# Altium PCB toasterBigBoardVERSION2_2layer.PcbDoc
Units mil, origin at the board's own origin, x right, y up, seen from the top; angles counter-clockwise.
Board outline 12550 x 9550 mil, 2 copper layers (Top Layer, Bottom Layer), stack 12.8 mil thick; 23 components, 6 nets, 49 pads, 62 vias.
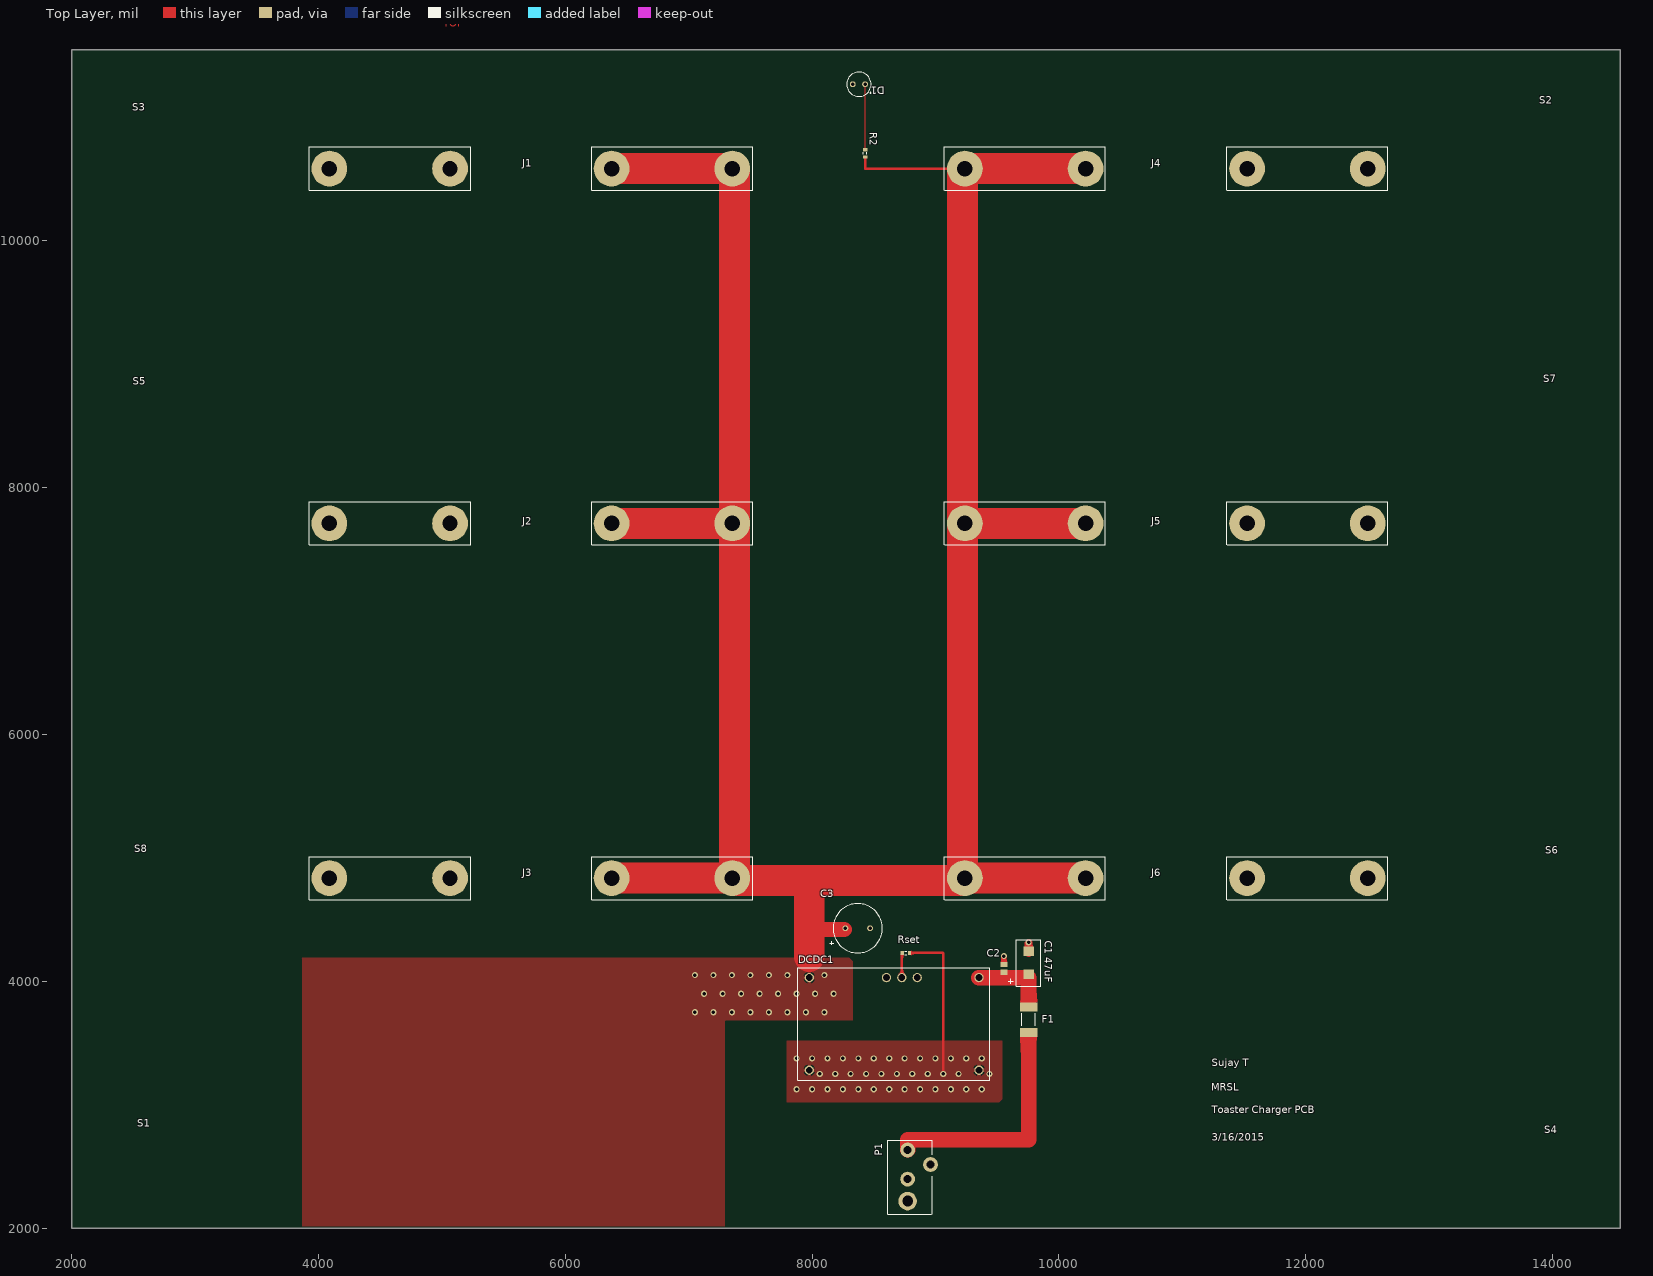
[diagram p0: Top Layer view]
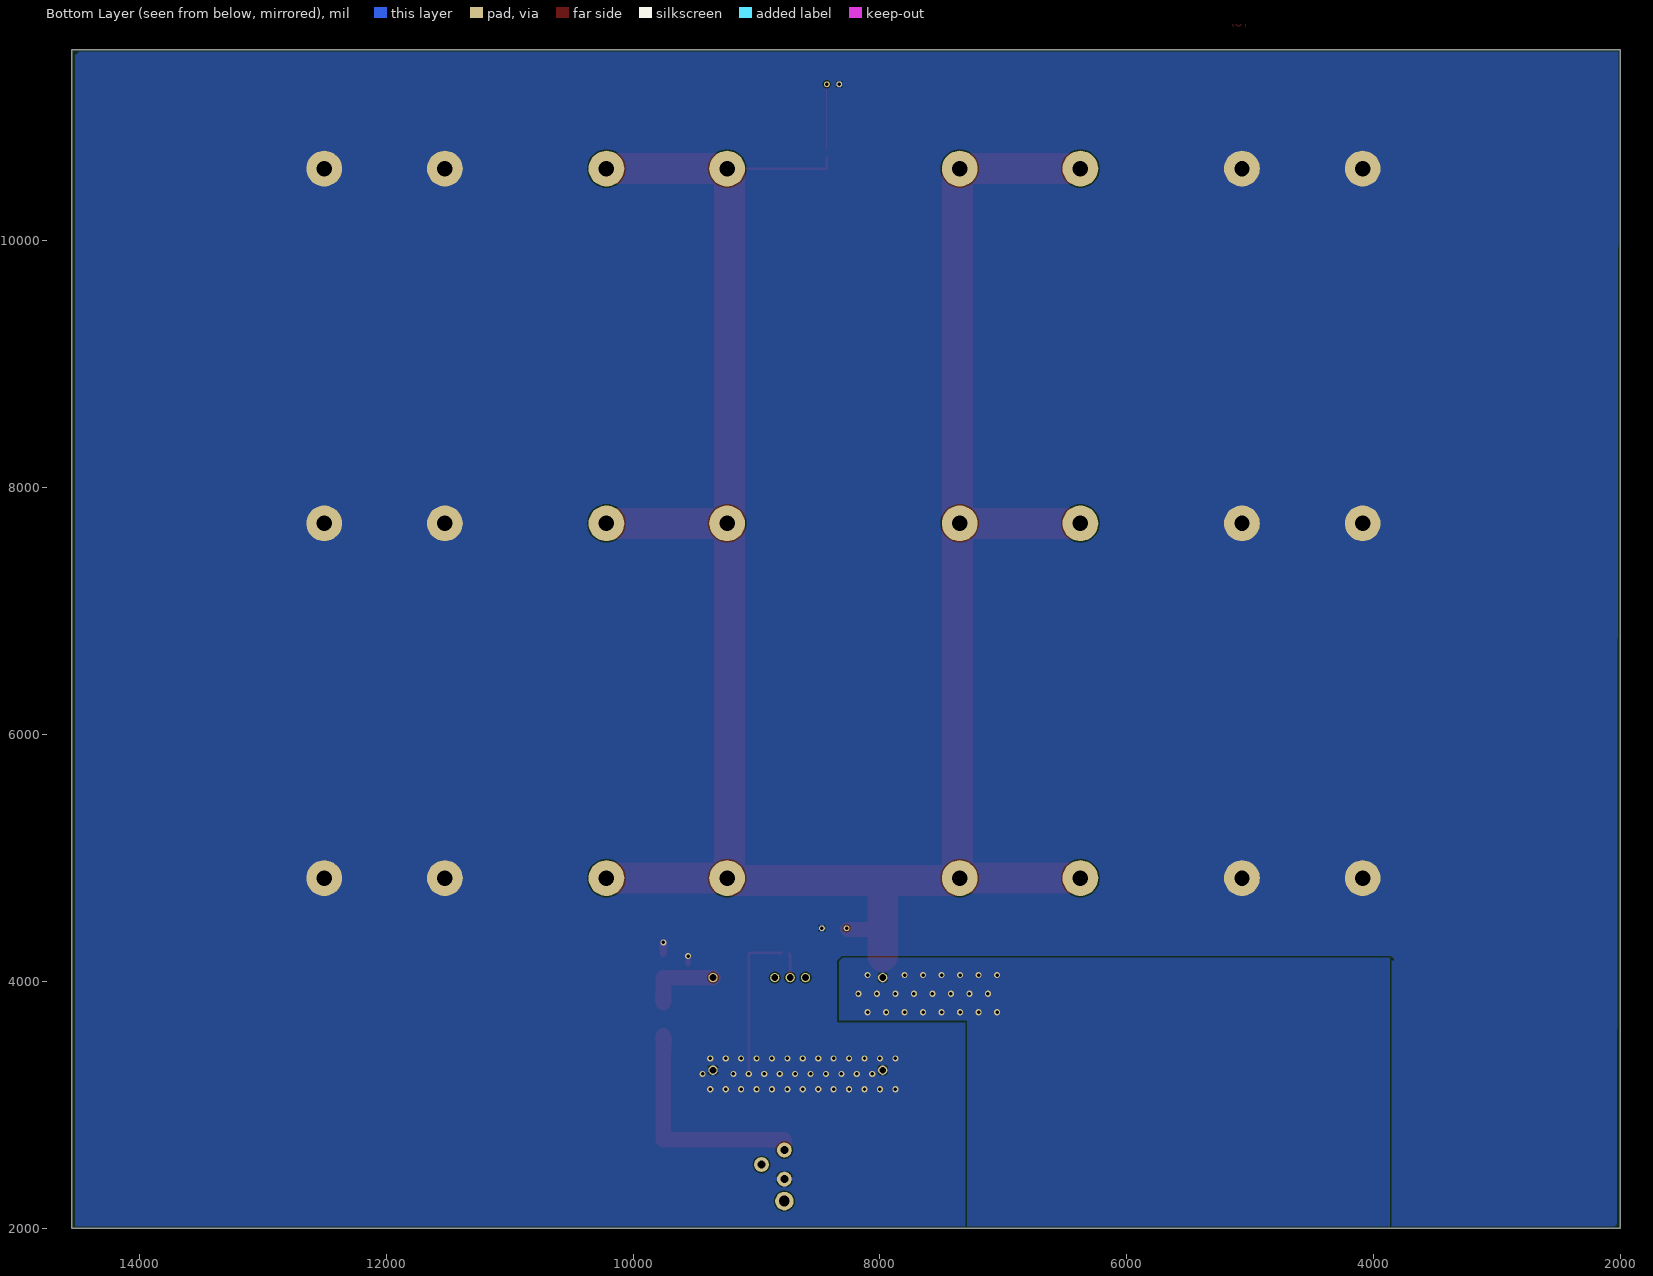
[diagram p1: Bottom Layer view, seen from below]

## Layer stack, top to bottom
Top Solder: solder mask 0.4, Solder Resist, Dk 3.5
Top Layer: signal copper 1.4
Dielectric1: core 10, FR-4, Dk 4.2
Bottom Layer: signal copper 1.4
Bottom Solder: solder mask 0.4, Solder Resist, Dk 3.5

## Board outline
2000,2000 14550,2000 14550,11550 2000,11550

## Design rules (kind name [scope] priority, off if disabled: settings)
Clearance [All] p1: gap=10
HoleSize [All] p1: absolutevalues=TRUE maxlimit=500 minlimit=1 maxpercent=80.000 minpercent=20.000
PlaneConnect [InNet('GND')] p1: planeconnectstyle=Direct reliefexpansion=20 reliefentries=4 reliefconductorwidth=10 reliefairgap=10
PolygonConnect PolygonConnect_1 [( ( InNet('GND') AND ( InComponent('P1') OR InComponent('C3') OR InComponent('DCDC1')OR InComponent('D1') ) )  OR (InNet('VOUT')AND InComponent('DCDC1')) )] p1: connectstyle=Relief reliefconductorwidth=35 reliefentries=4 polygonreliefangle="90 Angle" airgapwidth=10
PolygonConnect [All] p2: connectstyle=Direct reliefconductorwidth=10 reliefentries=4 polygonreliefangle="90 Angle" airgapwidth=10
RoutingLayers RoutingLayers_1 [All] p1: top layer_v5=TRUE bottom layer_v5=TRUE
RoutingLayers [OnLayer('GND Plane')] p2: top layer_v5=TRUE bottom layer_v5=TRUE
RoutingVias [All] p1: holewidth=28 width=50 viastyle="Through Hole" minholewidth=28 minwidth=50 maxholewidth=28 maxwidth=50
SMDNeckDown [All] p1 off: percent=50.000
SilkToSolderMaskClearance SilkscreenOverComponentPads [IsPad] p1: minsilkscreentomaskgap=3 clearancetoexposedcopper=TRUE
SolderMaskExpansion [All] p1: expansion=4
Width "Schematic Width Constraint_1" [InNet('VOUT')] p1: maxlimit=250 minlimit=20 preferedwidth=125 minimp=50.000000 maximp=50.000000 favimp=50.000000
Width "Schematic Width Constraint" [InNet('GND')] p2: maxlimit=250 minlimit=20 preferedwidth=125 minimp=50.000000 maximp=50.000000 favimp=50.000000
Width "Schematic Width Constraint_6" [InNet('12V_IN')] p3: maxlimit=250 minlimit=20 preferedwidth=125 minimp=50.000000 maximp=50.000000 favimp=50.000000
Width "Schematic Width Constraint_4" [InNet('12V_RAW')] p4: maxlimit=250 minlimit=20 preferedwidth=125 minimp=50.000000 maximp=50.000000 favimp=50.000000
Width [All] p5: maxlimit=60 minlimit=10 preferedwidth=10 minimp=50.000000 maximp=50.000000 favimp=50.000000
26 further rules are at their usual default settings.

## Components (designator, comment, footprint, x,y, rotation, side; value= is the part's Value field where it differs from the comment)
"C1 47uF" "CapTant6032-28" CAPTANT6032-28 9755,4150 r90 top
C2 "CIN" CAPC2012L 9555,4105 r270 top
C3 "COUT" "RAD-0.2 - POLARIZED" 8370,4430 r180 top
D1 "LED Power 1" DIODE-0.1 8380,11270 r180 top
DCDC1 "PTN78020WAH" PTN78020WAH 8665,3655 r180 top
F1 "PTC" J1-1812 9755,3690 r90 top
J1 "ToasterChargerProng" TOASTERCHARGERPRONG 5720.65,10586.5 r180 top
J2 "ToasterChargerProng" TOASTERCHARGERPRONG 5720.65,7711.5 r180 top
J3 "ToasterChargerProng" TOASTERCHARGERPRONG 5720.65,4836.5 r180 top
J4 "ToasterChargerProng" TOASTERCHARGERPRONG 10870.9,10586.5 r0 top
J5 "ToasterChargerProng" TOASTERCHARGERPRONG 10870.9,7711.5 r0 top
J6 "ToasterChargerProng" TOASTERCHARGERPRONG 10870.9,4836.5 r0 top
P1 "PJ-059A" PJ-059A 8782,2421 r90 top
R2 "Resistor" J1-0603 8430,10710 r90 top
Rset "Resistor" J1-0603 8760,4230 r0 top
S1 "ToasterChargerZiptie" TOASTERCHARGERZIPTIEREVISED2 2562.5,2625 r0 top
S2 "ToasterChargerZiptie" TOASTERCHARGERZIPTIEREVISED2 13987.5,10925 r0 top
S3 "ToasterChargerZiptie" TOASTERCHARGERZIPTIEREVISED2 2562.5,10925 r0 top
S4 "ToasterChargerZiptie" TOASTERCHARGERZIPTIEREVISED2 13987.5,2625 r0 top
S5 "ToasterChargerZiptie" TOASTERCHARGERZIPTIEREVISED2 2562.5,8675 r180 top
S6 "ToasterChargerZiptie" TOASTERCHARGERZIPTIEREVISED2 13987.5,4875 r180 top
S7 "ToasterChargerZiptie" TOASTERCHARGERZIPTIEREVISED2 13987.5,8675 r180 top
S8 "ToasterChargerZiptie" TOASTERCHARGERZIPTIEREVISED2 2562.5,4875 r180 top

## Footprints (in the part's own frame and the unit in brackets; to place one, negate y for a bottom-side part, rotate by r counter-clockwise, add the part's x,y. Pads: shape width x height; smd on the part's side, far side on the other; paste and mask are expansions set on the pad)
CAPC2012L [mm] "Chip Capacitor, Body 2.0x1.3mm, IPC High Density"
  rect 1.1x1.4 smd: 1(-0.8,0) 2(0.8,0)
  body extent -1.1,-0.72 1.1,0.72, height 1.4
CAPTANT6032-28 [mm] "Standard capacitor sized at a C Case (6.0 x 3.2 mm)"
  rect 1.99x2.13 smd: 1(-2.36,0) 2(2.36,0)
  silkscreen extent -4.79,-2.5 4.79,4.22, body extent -2.9,-1.55 2.9,1.5, height 2.79
DIODE-0.1 [mm] "Diode, thru-hole with leads 2.54 mm apart. For use in Toaster Charger"
  round 1.2 hole 0.7: 1(-1.27,0) 2(1.27,0)
  silkscreen extent -2.57,-2.5 2.5,2.5
J1-0603 [mm] "Chip Resistor, Body 1.6x0.8mm, IPC High Density"
  rect 0.7x0.9 smd: 1(-0.75,0) 2(0.75,0)
  silkscreen extent -0.2,-0.35 0.2,0.35, body extent -0.85,-0.48 0.85,0.48, height 0.9
J1-1812 [mm] "Standard surface mount chip - 45 x 32 mm"
  rect 1.85x3.6 smd: 1(-2.615,0) 2(2.615,0)
  silkscreen extent -1.3,-1.4 1.3,1.4
PJ-059A [mil] "DC power jack, rated at 16 V. For use in Toaster Charger."
  round 120 hole 63: 1(212,7.5) 2(-24,7.5) 3(94,-177.5)
  round 150 hole 87: 4(-202,7.5)
  silkscreen extent -310,-190 291,170, body extent -305,-185 285,165, height 433
PTN78020WAH [mil] "T.I. DC/DC Converter (PTH)"
  round 75 hole 55: 1(-687.5,375) 2(-687.5,-375) 3(-187.5,-375) 4(-62.5,-375) 5(62.5,-375) 6(687.5,-375) 7(687.5,375)
  silkscreen extent -775,-455 780,455, body extent -770,-445 775,450, height 350
"RAD-0.2 - POLARIZED" [mm] "Polarized Radial Cap, Thru-Hole; 2 Leads; 0.2 in Pin Spacing."
  round 1.2 hole 0.7: 1(-2.54,0) 2(2.54,0)
  silkscreen extent -5.08,-5.08 5.71,5.08, body extent -5.07,-5.08 5.08,5.08, height 13.46
TOASTERCHARGERPRONG [mil] "PCB footprint for toaster Charger clips"
  round 290 hole 125: 1(-1632.6,0) 2(-654.6,0) 3(654.6,0) 4(1632.6,0)
  silkscreen extent -1799,-175 1794,175
TOASTERCHARGERZIPTIEREVISED2 [mil] "2nd revision for Ziptie for Toaster charger, now a cut on the mechanical layer."

## Part data
"C1 47uF": "Polarized Tantalum Capacitor for use in Toaster Charger"
C2 C3: library part Cap, "Capacitor"
D1: library part Diode, "Default Diode"
DCDC1: "T.I. DC-DC Converter"
F1: library part PTC_FUSE, "Fuse"
J1 J2 J3 J4 J5 J6: "Charger Prong Footprint for Toaster Charger"
S1 S2 S3 S4 S5 S6 S7 S8: "Slot for Ziptie connection between PCB and Toaster Charger"

## Via types
v1: diameter 50, hole 28, Top Layer to Bottom Layer, 62 vias

## Nets (pads, with @x,y where several pads share a name; then routed paths per layer and width w, separated by ;. In a path a pad name is that pad's centre, name@x,y a point inside that pad or via, vN(x,y) a via of type N, cw(c..) or ccw(c..) an arc to the next point about the centre after c; other vN are vias at no path point)
12V_IN: "C1 47uF.1" C2.2 DCDC1.2 F1.2 | length 607.5
  Top Layer w125: DCDC1.2 9755,4030 F1.2@9755,3825
12V_RAW: F1.1 P1.1 | length 1907.5
  Top Layer w125: P1.1 8774.5,2714.5 9755,2714.5 F1.1@9755,3560
D1_IN: D1.1 R2.2 | length 530
  Top Layer w10: R2.2@8430,10740 D1.1
GND: "C1 47uF.2" C2.1 C3.1 D1.2 DCDC1.1 DCDC1.7 J1.3 J1.4 J2.3 J2.4 J3.3 J3.4 J4.3 J4.4 J5.3 J5.4 J6.3 J6.4 P1.2 Rset.2 | length 1368.1
  Top Layer w20: Rset.2@8799.53,4230 9060,4230 9065,4225 9065,3280
  Top Layer w40: C2.1 v1(9555,4205)
  Top Layer w60: 9755,4227.91 v1(9755,4315)
  other v1: 7875,3125 8000,3125 8125,3125 8250,3125 8375,3125 8500,3125 8625,3125 8750,3125 8875,3125 9000,3125 9125,3125 9250,3125 9375,3125 8062.5,3250 8187.5,3250 8312.5,3250 8437.5,3250 8562.5,3250 8687.5,3250 8812.5,3250 8937.5,3250 9062.5,3250 9187.5,3250 9437.5,3250 7875,3375 8000,3375 8125,3375 8250,3375 8375,3375 8500,3375 8625,3375 8750,3375 8875,3375 9000,3375 9125,3375 9250,3375 9375,3375
VOADJUST: DCDC1.4 Rset.1 | length 205.4
  Top Layer w10: Rset.1@8727.5,4217.03 Rset.1@8740.47,4230
  Top Layer w20: DCDC1.4 Rset.1@8727.5,4217.03
VOUT: C3.2 DCDC1.6 J1.1 J1.2 J2.1 J2.2 J3.1 J3.2 J4.1 J4.2 J5.1 J5.2 J6.1 J6.2 R2.1 | length 21071.1
  Top Layer w20: R2.1 8430,10585 J4.1@9236.8,10585
  Top Layer w125: 7977.5,4420 C3.2@8260,4420
  Top Layer w250: J3.2 J3.1 ; J2.2 J2.1 ; J1.2 J1.1 7372.25,10567.5 7372.25,4817.5 7977.5,4817.5 ; 7977.5,4200 7977.5,4420 7977.5,4817.5 ; J6.1 J6.2 ; J5.1 J5.2 ; J4.2 J4.1 9236.8,10585 9219.3,10567.5 9219.3,4817.5 7977.5,4817.5
  other v1: 7050,3750 7200,3750 7350,3750 7500,3750 7650,3750 7800,3750 7950,3750 8100,3750 7125,3900 7275,3900 7425,3900 7575,3900 7725,3900 7875,3900 8025,3900 8175,3900 7050,4050 7200,4050 7350,4050 7500,4050 7650,4050 7800,4050 8100,4050
pads on no net: DCDC1.3 DCDC1.5 P1.3 P1.4

## Polygon pours and split planes (outlines as drawn)
GND on Bottom Layer "Bottom Layer-No Net" (solid, pour order 7): 2045,2015 3851,2015 3851,4173.27 3846.36,4168.64 cw(c3840,4175) 3833.64,4181.36 3858.64,4206.36 3865,4209 8305,4209 8311.36,4206.36 8346.36,4171.36 8349,4165 8349,3680 8346.36,3673.64 8341.36,3668.64 8335,3666 7309,3666 7309,2015 14520,2015 14520,11505 14500,11525 14490,11535 2015,11535 2030,2030
VOUT on Bottom Layer "Vout Bottom Plane" (solid, pour order 6): 3865.13,4187.4 3869,4180 3869,2015 7291,2015 7291,3675 7300,3684 8331,3684 8331,4161.27 8301.27,4191 3868.73,4191
GND on Top Layer "Top Layer-No Net" (solid, pour order 8): 7795,3520 7795,3020 9515,3020 9540,3045 9540,3520
VOUT on Top Layer "Vout Top Plane" (solid, pour order 5): 3865.13,4187.4 3869,4180 3869,2015 7291,2015 7291,3675 7300,3684 8331,3684 8331,4161.27 8301.27,4191 3868.73,4191

## Other copper
Top Layer:
  text "TOP" at 5010,11735 h60

## Silkscreen, mask and mechanical layers (free items; w line width, h text height)
Top Overlay:
  text "Sujay T" at 11240,3310 h60
  text "MRSL" at 11235,3115 h60
  text "Toaster Charger PCB" at 11240,2930 h60
  text "3/16/2015" at 11240,2710 h60